# Altium PCB uku20710_proc.PcbDoc (part 1 of 2)
Units mm, origin at the board's own origin, x right, y up, seen from the top; angles counter-clockwise.
Board outline 354.7 x 156.7 mm, 4 copper layers (Top Layer, MidLayer1, MidLayer2, Bottom Layer); 206 components, 528 nets, 730 pads, 458 vias.
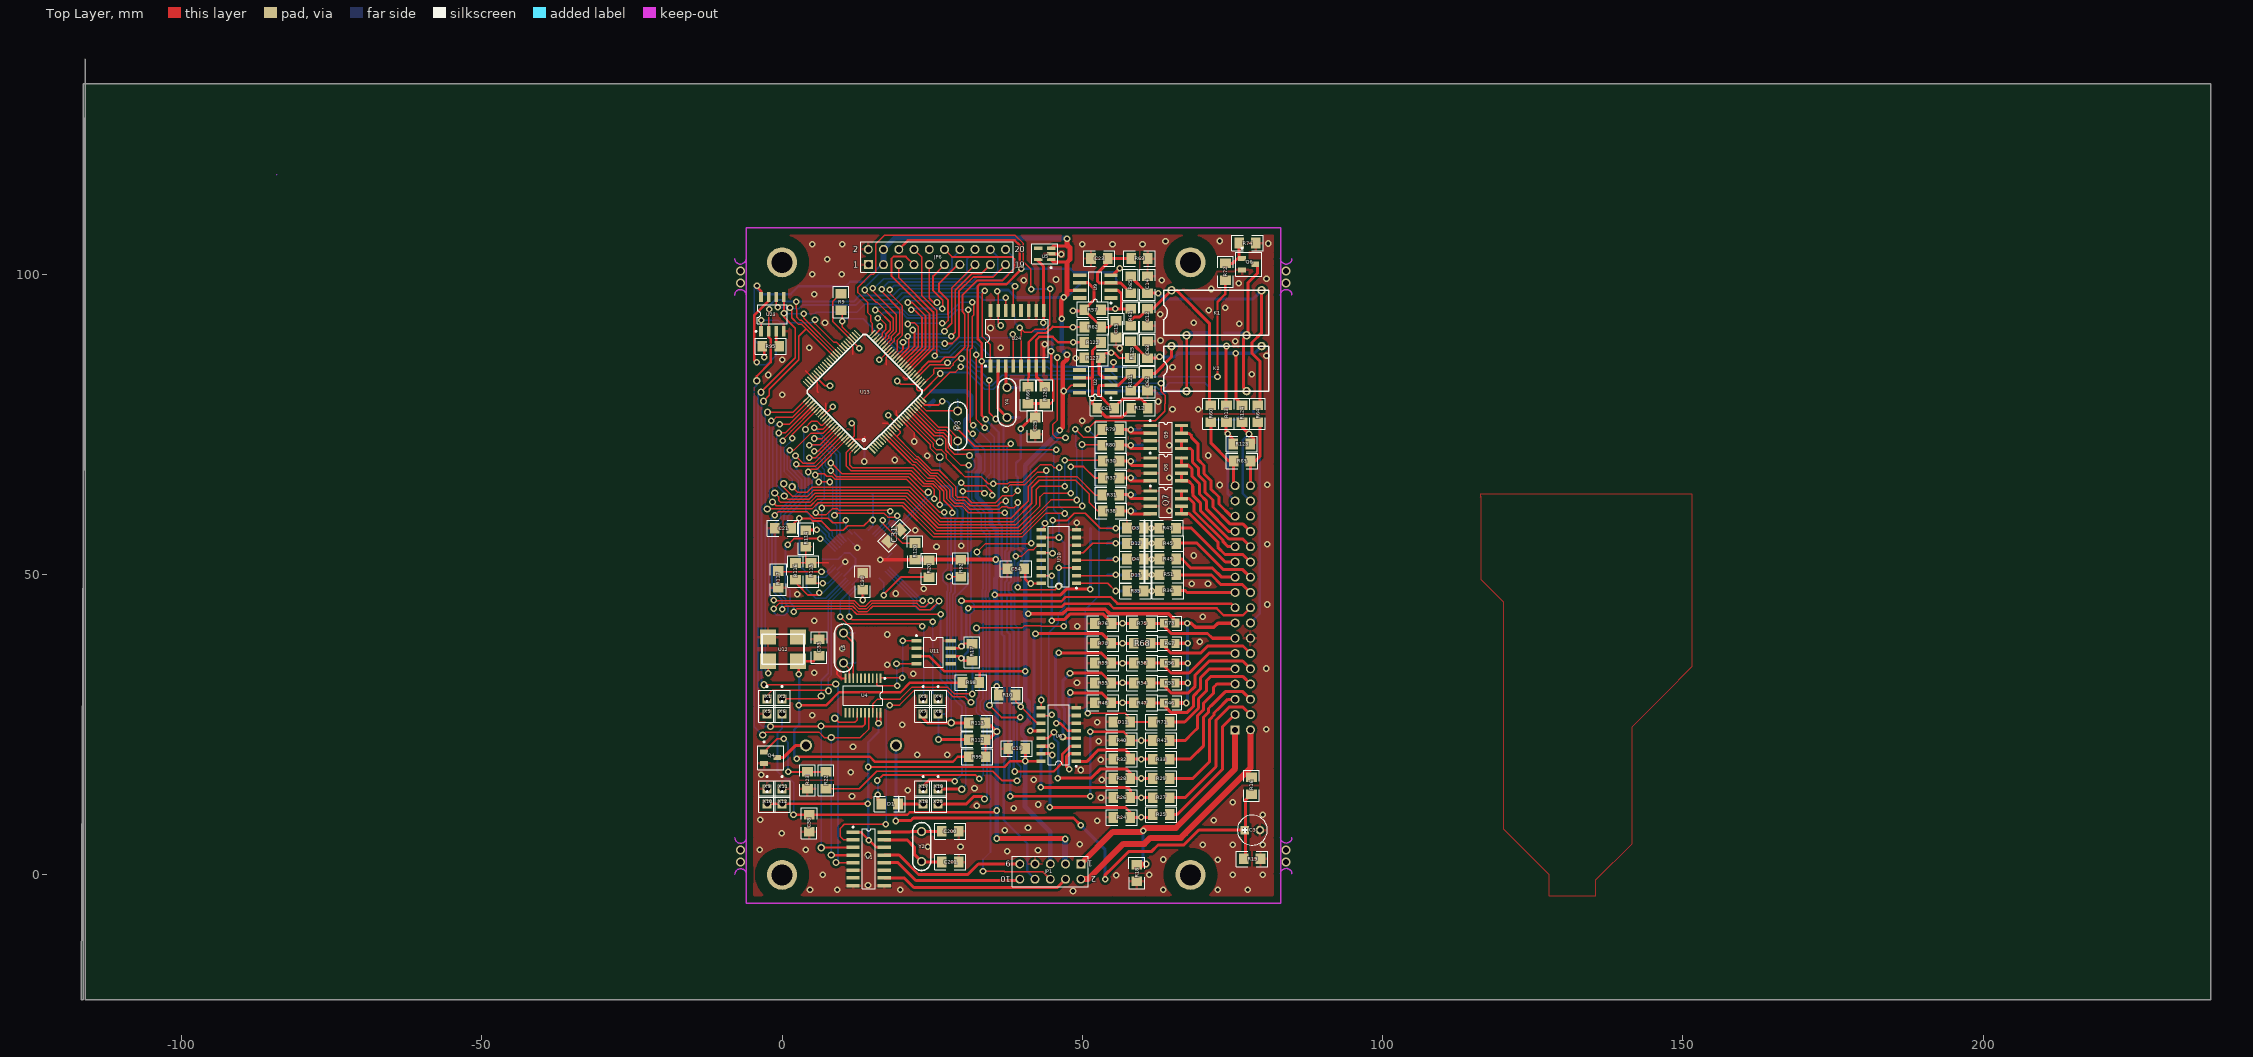
[diagram p0: Top Layer view]
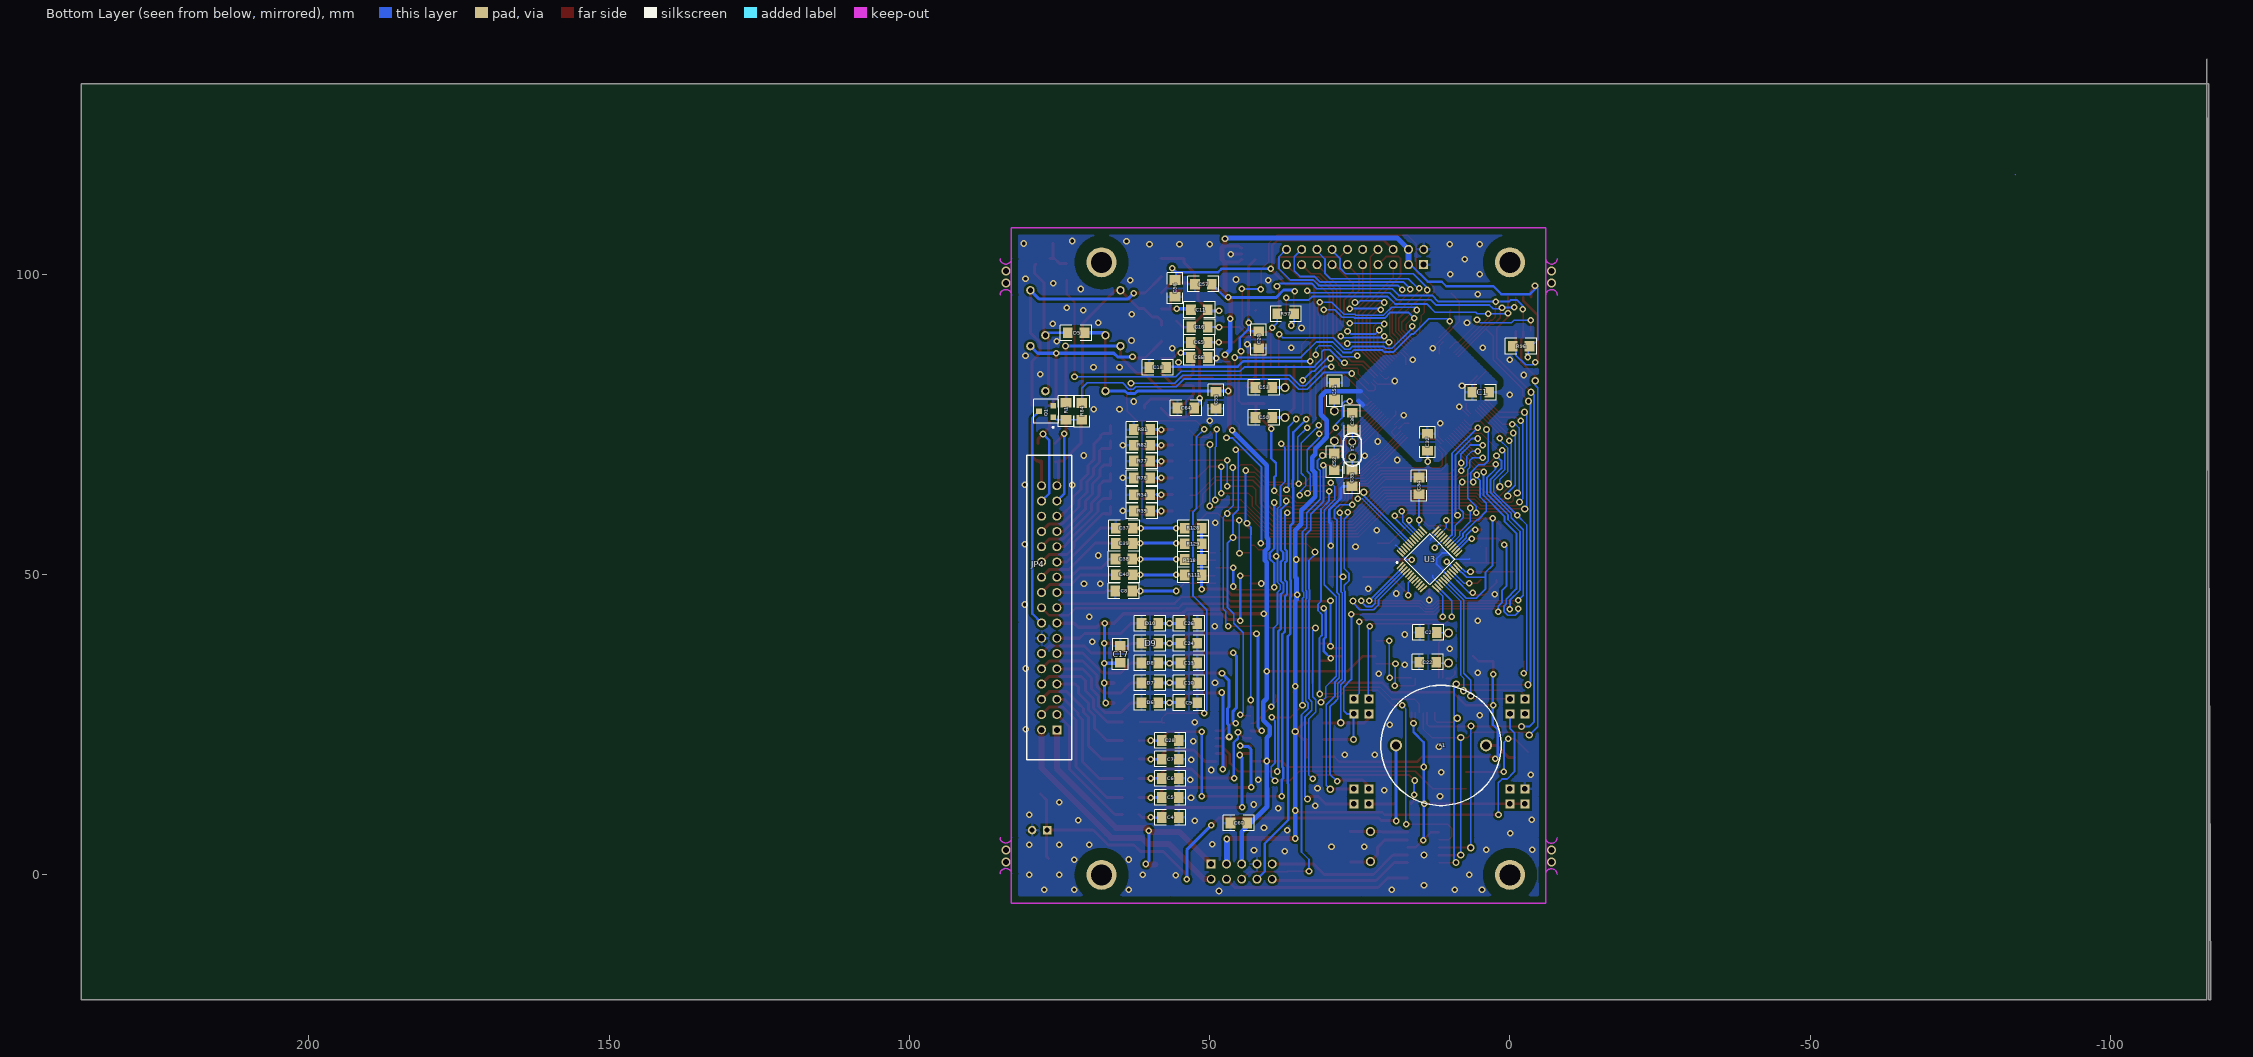
[diagram p1: Bottom Layer view, seen from below]

## Layer stack, top to bottom
Top Layer: signal copper 0.0356
Dielectric: core 0.32, FR-4, Dk 4.8
MidLayer1: signal copper 0.0356
Dielectric: prepreg 0.32, FR-4, Dk 4.8
MidLayer2: signal copper 0.0356
Dielectric: core 0.32, FR-4, Dk 4.8
Bottom Layer: signal copper 0.0356

## Board outline
-116.05,135.85 -116.05,-20.85 237.95,-20.85 237.95,131.7 -116.4,131.7 -116.4,-20.85 -116.75,-20.85

## Design rules (kind name [scope] priority, off if disabled: settings)
Clearance Holes [InPoly vs HasPad('Free-0') Or HasPad('Free-1') Or HasPad('Free-2') Or HasPad('Free-3')] p1: gap=2
Clearance Clearance_2 [All vs InPoly and InNet(GND_P)] p2: gap=1
Clearance Высоковольтное_2 [InNet(NetC511_2) or
InNet(NetD500_1) or
InNet(NetD503_1) or
InNet(NetD501_1) or
InNet(NetC500_2) or
InNet(NetC512_2) or
InNet(NetD500_2) or
InNet(NetD505_1) or
InNet(NetD506_1) or
InNet(NetD505_2) or
InNet(NetBT2_1) or
InNet(NetC516_2) or
InNet(NetC516_1) or
InNet(NetD20_2)  or
InNet(NetC510_1) or
InNet(NetC513_2) or
InNet(NetC517_1) vs InPoly] p3: gap=0.6
Clearance Высоковольтное [InNet(NetC505_2) or InNet(NetFU500_1)
or InNet(NetC511_1)or InNet(NetC502_2) vs InPoly] p4: gap=1
Clearance Clearance_1 [InComponent(U1)] p5: gap=0.19
Clearance Keep_Out [OnLayer('Keep-Out Layer')] p6: gap=1
Clearance Poly_Poly [InPoly vs InPoly] p7: gap=1
Clearance Poly [InPoly] p8: gap=0.4
Clearance "Для разъёма и индикатора" [InComponent(JP1) or InComponent(U2)] p9: gap=0.3
Clearance [All] p10: gap=0.18
ComponentClearance [All] p1: gap=0.254 collisioncheckmode=0
HoleSize [All] p1: absolutevalues=TRUE maxlimit=5 minlimit=0.025 maxpercent=80.000 minpercent=20.000
PolygonConnect [All] p1: connectstyle=Relief reliefconductorwidth=0.4 reliefentries=4 polygonreliefangle="90 Angle"
RoutingLayers [All] p1: top layer=Horizontal mid layer 1="Not Used" mid layer 2="Not Used" bottom layer=Vertical
RoutingVias [All] p1: holewidth=0.6 width=1.1 viastyle="Through Hole" minholewidth=0.6 minwidth=1.1 maxholewidth=0.7 maxwidth=1.2
SolderMaskExpansion [All] p1: expansion=0.102
TestPointUsage [All] p1: valid=0 allowmultiple=FALSE
Testpoint [All] p1: side=15 testpointundercomponent=TRUE minsize=1.016 maxsize=2.54 preferedsize=1.524 minholesize=0 maxholesize=1.016 preferedholesize=0.813 testpointgrid=0.025 style=1023 order=1234567890
Width [All] p1: maxlimit=2 minlimit=0.2 preferedwidth=0.254 toplayer_prefwidth=0.4 midlayer1_prefwidth=0.3 midlayer2_prefwidth=0.3 bottomlayer_prefwidth=0.4 minimp=50.000000 maximp=50.000000 favimp=50.000000
15 further rules are at their usual default settings.

## Classes and differential pairs
component class ETH: C21 C30 C31 C32 C33 C34 R20 R98 R99 R112 R113 R114 R115 R116 R117 R120 U3 U12 X1 X2 X3 X4 X5 X6 X7 X8
component class CPU: A1 C1 C2 C3 C22 C35 C36 C50 C51 C52 C53 C54 C55 C56 C57 C58 C60 C200 C201 D1 JP1 JP4 JP6 Q4 R9 R10 R16 R17 R18 R19 R22 R23 R92 R95 R96 R97 U1 U4 U5 U11 U13 U23 U24 X9 X10 X11 X12 X17 X18 X19 X20 Y1 Y2 Y3 Y4 Y5
component class IBPV11: +IAKB1 C4 C5 C6 C7 C8 C9 C10 C11 C12 C13 C14 C15 C16 C17 C18 C19 C20 C23 C24 C25 C26 C28 C37 C38 C39 C40 C61 C62 C63 C64 C65 C66 D3 D4 D5 D6 D7 D8 D9 D10 D11 D12 D13 K1 K2 NetC25_1 NetJ1_2 NetU14_4 NetU14_5 P0_3 P0_8_ P0_9_ P1_29 P1_31 PROG1 Q1 Q6 Q7 Q8 Q9 R1 R12 R13 R24 R25 R26 R27 R28 R29 R30 R31 R32 R33 R34 R35 R36 R37 R38 R39 R40 R41 R43 R45 R46 R47 R48 R49 R51 R53 R54 R55 R56 R57 R58 R59 R60 R61 R62 R63 R64 R65 R66 R67 R68 R69 R70 R71 R72 R73 R74 R75 R76 R77 R78 R79 R80 R81 R82 R84 R111 R118 R121 R122 R123 R124 R125 R126 R127 R128 R129 U2 U6 U9 U10 UU2 X39 X40 X41 X42 X43 X44 X45 X46 X47

## Components (designator, comment, footprint, x,y, rotation, side; value= is the part's Value field where it differs from the comment)
A1 "EFM260" Pjezo15 6.476,21.556 r0 bottom
C1 "1.0" _1206#1 4.85,80.35 r180 bottom
C2 "Cap Semi" _1206#1 13.577,40.361 r180 bottom
C3 "22.0 x 50" el3 77.05,7.45 r0 top
C4 "1.0" _1206#2 56.55,9.55 r180 bottom (schematic designator C11)
C5 "1.0" _1206#2 56.55,12.85 r180 bottom
C6 "1.0" _1206#2 56.55,16.05 r180 bottom (schematic designator C7)
C7 "1.0" _1206#2 56.55,19.25 r180 bottom (schematic designator C13)
C8 "1.0" _1206#2 64.29,47.263 r0 bottom (schematic designator C?)
C9 "1.0" _1206#2 53.45,28.65 r180 bottom (schematic designator C8)
C10 "1.0" _1206#2 53.45,31.95 r180 bottom (schematic designator C16)
C11 "0.1" _1206#2 51.7,94.1 r0 bottom
C12 "1.0" _1206#2 60.85,92.85 r90 top
C13 "1.0" _1206#2 53.45,35.25 r180 bottom
C14 "1.0" _1206#2 60.85,98.25 r270 top
C15 "1.0" _1206#2 55.6,90.874 r90 top
C16 "1.0" _1206#2 51.7,91.2 r180 bottom
C17 "1.0" _1206#2 64.89,36.71 r270 bottom
C18 "1.0" _1206#2 58.65,84.45 r180 bottom
C19 "1.0" _1206#2 39.06,21.005 r0 top
C20 "1.0" _1206#2 41.835,89.103 r90 bottom
C21 "0.1" C3216-1206 0.151,57.701 r180 top
C22 "Cap Semi" _1206#1 13.677,35.41 r180 bottom
C23 "0.1" _1206#2 52.837,102.627 r180 top
C24 "1.0" _1206#2 53.45,38.55 r180 bottom
C25 "1.0" _1206#2 42.15,74.75 r90 top
C26 "1.0" _1206#2 53.45,41.85 r180 bottom
C28 "1.0" _1206#2 56.55,22.35 r180 bottom
C30 "0.1" _1206#1 13.428,48.835 r270 top
C31 "0.1" _1206#1 18.654,56.5 r45 top
C32 "0.1" _1206#1 13.726,72.018 r270 bottom
C33 "0.1" _1206#1 6.152,37.86 r90 top
C34 "10,0x16" C3216-1206 15.128,64.767 r90 bottom
C35 "33" _1206#1 26.3,66.1 r90 bottom
C36 "33" _1206#1 26.25,75.55 r270 bottom
C37 "1.0" _1206#1 64.24,57.716 r0 bottom
C38 "1.0" _1206#1 64.29,52.564 r0 bottom
C39 "1.0" _1206#1 64.24,55.165 r0 bottom
C40 "1.0" _1206#1 64.24,49.964 r0 bottom
C50 "10" _1206#1 40.95,76.15 r180 bottom
C51 "10" _1206#2 29.2,80.55 r270 bottom
C52 "10" _1206#2 29.25,68.75 r90 bottom
C53 "10" _1206#1 40.95,81.15 r180 bottom
C54 "1.0" _1206#2 38.934,50.964 r0 top
C55 "1.0" _1206#2 48.95,79.05 r90 bottom
C56 "1.0" _1206#2 55.75,97.65 r90 bottom
C57 "1.0" _1206#2 51.05,98.35 r180 bottom
C58 "1.0" _1206#1 4.501,8.602 r90 top
C60 "1.0" _1206#2 45.135,8.603 r180 bottom
C61 "0.1" _1206#2 53.9,77.7 r0 top
C62 "1.0" _1206#2 60.85,82.05 r90 top
C63 "1.0" _1206#2 60.85,87.45 r270 top
C64 "1.0" _1206#2 53.95,77.75 r180 bottom
C65 "1.0" _1206#2 51.75,88.65 r180 bottom
C66 "0.1" _1206#2 51.75,86.15 r180 bottom
C200 "10" _1206#1 27.981,7.253 r180 top (schematic designator C2)
C201 "10" _1206#1 27.981,2.102 r180 top
D1 "LL4148" _1206d#1 17.905,11.803 r180 top
D3 "BZV55-C5V6" _1206d#1 58.839,57.716 r180 top
D4 "BZV55-C5V6" _1206d#1 58.839,52.564 r180 top
D5 "LL4148" _1206d#2 72.25,90.25 r0 bottom
D6 "BZV55-C5V6" _1206d#1 59.95,28.65 r0 bottom
D7 "BZV55-C5V6" _1206d#1 59.95,31.95 r0 bottom
D8 "BZV55-C5V6" _1206d#2 59.95,35.25 r0 bottom
D9 "BZV55-C5V6" _1206d#2 59.95,38.55 r0 bottom
D10 "BZV55-C5V6" _1206d#1 59.95,41.85 r0 bottom
D11 "BZV55-C3V9" _1206d#1 56.55,25.45 r180 top
D12 "BZV55-C5V6" _1206d#1 58.839,55.165 r180 top
D13 "BZV55-C5V6" _1206d#1 58.839,49.964 r180 top
JP1 "PBD-10" HDR2X5 49.736,1.8 r180 top
JP4 "IDC34" IDC34M 75.45,24.15 r90 bottom
JP6 "PBD-20" HDR2X10 14.35,101.6 r0 top
K1 "DH1A" kuan 64.85,89.85 r0 top
K2 "DH1A" kuan 64.85,80.55 r0 top
Q1 "IRLML2402" SO-G3/Z3.3 77.243,77.171 r90 bottom
Q4 "BC846" SO-G3 -1.9,19.505 r270 top
Q6 "BC846" SO-G3 77.7,101.677 r270 top
Q7 "IRF7103" SO-G8/Y2.2#1 63.9,62 r270 top
Q8 "IRF7103" SO-G8/Y2.2#2 63.9,67.5 r270 top
Q9 "IRF7103" SO-G8/Y2.2#2 63.9,72.9 r270 top
R1 "10K" _1206#1 73.893,77.171 r270 bottom
R9 "10K" _1206#1 9.825,95.374 r270 top
R10 "2K7" _1206#1 37.459,29.958 r180 top
R12 "20K" _1206#1 59.5,77.7 r180 top
R13 "10R" _1206#1 73.993,76.77 r270 top
R16 "10K" _1206#1 78.15,14.85 r90 top
R17 "K10" _1206#2 31.632,37.06 r90 top
R18 "1R" _1206#2 59.065,0.3 r270 top
R19 "2K7" _1206#1 78.25,2.65 r180 top
R20 "10K" _1206#1 24.478,50.985 r90 top
R22 "1K0" _1206#1 7.302,15.754 r90 top
R23 "10K" _1206#1 4.201,15.754 r90 top
R24 "1K0" _1206#1 56.55,9.55 r180 top
R25 "33K" _1206#1 63.15,10.053 r0 top
R26 "1K0" _1206#1 56.55,12.85 r180 top
R27 "33K" _1206#1 63.15,12.85 r0 top
R28 "1K0" _1206#1 56.55,16.05 r180 top
R29 "33K" _1206#1 63.15,16.05 r0 top
R30 "1K0" _1206#1 54.8,68.9 r0 top
R31 "1K0" _1206#1 54.75,63.25 r0 top
R32 "1K0" _1206#1 56.55,19.25 r180 top
R33 "33K" _1206#1 63.15,19.25 r0 top
R34 "10K" _1206#1 61.25,63.3 r180 bottom
R35 "1K0" _1206#1 58.839,47.263 r180 top (schematic designator R?)
R36 "33K" _1206#1 64.29,47.313 r0 top (schematic designator R?)
R37 "1K0" _1206#1 54.8,66.1 r0 top
R38 "1K0" _1206#3 54.8,60.6 r0 top
R39 "10K" _1206#1 61.25,60.6 r180 bottom
R40 "1K0" _1206#1 56.55,22.35 r180 top
R41 "10K" _1206#1 63.15,22.35 r0 top
R43 "6K2" _1206#1 64.19,57.716 r180 top
R45 "6K2" _1206#1 64.24,55.165 r180 top
R46 "1K0" _0805 64.55,28.65 r0 top
R47 "2K7" _1206#1 59.95,28.65 r180 top
R48 "10K" _1206#1 53.45,28.65 r0 top
R49 "6K2" _1206#1 64.24,52.564 r180 top
R51 "6K2" _1206#1 64.24,49.964 r180 top
R53 "1K0" _0805 64.55,31.95 r0 top
R54 "2K7" _1206#1 59.95,31.95 r180 top
R55 "10K" _1206#1 53.45,31.95 r0 top
R56 "1K0" _0805 64.55,35.25 r0 top
R57 "20K" _1206#1 51.7,94.1 r180 top
R58 "2K7" _1206#1 59.95,35.25 r180 top
R59 "10K" _1206#1 53.45,35.25 r0 top
R60 "10R" _1206#1 71.392,76.77 r270 top
R61 "2K0" _1206#1 58.05,92.85 r90 top
R62 "20K" _1206#1 51.75,91.2 r180 top
R63 "10R" _1206#3 76.593,68.918 r180 top
R64 "10R" _1206#3 79.194,76.77 r270 top
R65 "2K0" _1206#3 58.05,98.25 r270 top
R66 "20K" _1206#1 40.95,79.85 r270 top
R67 "1K0" _0805 64.55,38.511 r0 top
R68 "2K7" _1206#1 59.95,38.55 r180 top
R69 "20K" _1206#1 59.5,102.6 r180 top
R70 "10K" _1206#1 53.45,38.55 r0 top
R71 "20K" _1206#1 63.15,25.45 r0 top
R72 "1K0" _1206#3 73.843,100.426 r90 top
R73 "1K0" _0805 64.55,41.912 r0 top
R74 "10K" _1206#1 77.494,105.178 r180 top
R75 "2K7" _1206#1 59.95,41.85 r180 top
R76 "10K" _1206#3 53.45,41.85 r0 top
R77 "10K" _1206#1 61.25,68.9 r180 bottom
R78 "10K" _1206#1 61.25,66.1 r180 bottom
R79 "1K0" _1206#1 54.75,74.15 r0 top
R80 "1K0" _1206#1 54.75,71.55 r0 top
R81 "10K" _1206#1 61.25,74.15 r180 bottom
R82 "10K" _1206#1 61.25,71.55 r180 bottom
R84 "1K0" _1206#2 71.292,77.171 r270 bottom
R92 "1K0" _1206#1 29.731,51.05 r90 top
R95 "2K7" _1206#1 -1.9,88 r180 top
R96 "2K7" _1206#1 -1.85,88 r0 bottom
R97 "1K0" _1206#1 37.333,93.425 r180 bottom
R98 "1R" _1206#1 31.458,32.008 r0 top
R99 "1R0" _1206#1 32.508,19.655 r0 top
R111 "33K" _1206#1 52.75,49.914 r0 bottom (schematic designator R?)
R112 "2K2" _1206#1 32.482,22.507 r0 top
R113 "2K2" _1206#1 32.482,25.307 r0 top
R114 "2K2" _1206#1 3.952,55.985 r270 top
R115 "2K2" _1206#1 4.828,50.535 r90 top
R116 "2K2" _1206#1 2.228,50.535 r90 top
R117 "4K87" _1206#1 -0.65,49.198 r90 top
R118 "33K" _1206#1 52.75,52.514 r0 bottom (schematic designator R?)
R120 "2K2" _1206#1 22.128,53.835 r270 top (schematic designator R100)
R121 "2K0" _1206#1 58.05,82.05 r90 top (schematic designator R101)
R122 "20K" _1206#1 51.7,88.65 r180 top (schematic designator R102)
R123 "10R" _1206#1 76.543,71.719 r180 top (schematic designator R103)
R124 "10R" _1206#1 76.593,76.77 r270 top (schematic designator R104)
R125 "2K0" _1206#1 58.05,87.45 r270 top (schematic designator R105)
R126 "20K" _1206#1 43.75,79.85 r270 top (schematic designator R106)
R127 "20K" _1206#1 51.7,86.1 r0 top (schematic designator R107)
R128 "33K" _1206#1 52.75,57.7 r0 bottom (schematic designator R?)
R129 "33K" _1206#1 52.75,55.115 r0 bottom (schematic designator R?)
U1 "SC16IS740" SO-G16 14.428,2.652 r270 top
U2 "OP07CS" SO-G8#1 52.15,82.15 r90 top
U3 "DP8348C" F-QFP7X7-G48/N 13.378,52.535 r135 bottom
U4 "MCP2515" TSSO6X6-G20/D6.6 13.477,29.859 r180 top
U5 "TPS76333" SO-G5/P.95 43.734,103.4 r90 top
U6 "MC14051BD" SO-G16/C5.85#1 46.05,23.35 r90 top
U9 "OP07CS" SO-G8#2 52.15,97.95 r90 top
U10 "MC14051BD" SO-G16/C5.85#2 46.1,53 r90 top
U11 "TJA1050" SO-G8/D5 25.23,37.06 r270 top
U12 "KXO-97-50MGz" KXO-97 0.15,37.559 r180 top
U13 "LPC1766FBD100" LPC2368 13.75,80.45 r45 top
U23 "25LC640" SO-G8/D5 -1.6,93.35 r0 top
U24 "AD7705" SO-G16/D10.4 39.15,89.35 r0 top
X1 "" PIN1#1 -2.503,29.3 r0 top
X2 "" PIN1#1 -0.003,29.3 r0 top
X3 "" PIN1#1 23.497,29.3 r0 top
X4 "" PIN1#2 25.997,29.3 r0 top
X5 "" PIN1#2 -2.503,26.8 r0 top
X6 "" PIN1#2 -0.003,26.8 r0 top
X7 "" PIN1#2 23.497,26.8 r0 top
X8 "" PIN1#2 25.997,26.8 r0 top
X9 "" PIN1#3 -2.503,14.3 r0 top
X10 "" PIN1#3 -2.503,11.8 r0 top
X11 "" PIN1#3 -0.003,14.3 r0 top
X12 "" PIN1#3 -0.003,11.8 r0 top
X17 "" PIN1#3 23.497,14.3 r0 top
X18 "" PIN1#3 23.497,11.8 r0 top
X19 "" PIN1#3 25.997,14.3 r0 top
X20 "" PIN1#3 25.997,11.8 r0 top
Y1 "32768" QWARZ2 26.255,72.049 r270 bottom
Y2 "10MGz" QWARZ1 23.23,2.202 r90 top
Y3 "10MGz" QWARZ1 29.25,77.25 r270 top
Y4 "4,9152MGz" QWARZ1 37.45,76.15 r90 top
Y5 "8MGz" QWARZ1 10.227,35.26 r90 top

## Footprints (in the part's own frame and the unit in brackets; to place one, negate y for a bottom-side part, rotate by r counter-clockwise, add the part's x,y. Pads: shape width x height; smd on the part's side, far side on the other; paste and mask are expansions set on the pad)
_0805 [mm]
  rect 1.3x1.5 smd: 1(-0.942,-0.005) 2(0.958,-0.005)
  silkscreen extent -1.99,-1.16 2.01,1.14
_1206#1 [mm]
  rect 1.6x1.8 smd: 1(-1.412,-0.007) 2(1.388,-0.007)
  silkscreen extent -2.61,-1.31 2.59,1.29
_1206#2 [mm]
  rect 1.6x1.8 smd: 1(-1.397,0.003) 2(1.403,0.003)
  silkscreen extent -2.6,-1.3 2.6,1.3
_1206#3 [mm]
  rect 1.6x1.8 smd: 1(-1.4,0) 2(1.4,0)
  silkscreen extent -2.6,-1.3 2.6,1.3
_1206d#1 [mm]
  rect 1.6x1.8 smd: 1(1.395,-0.009) 2(-1.405,-0.009)
  silkscreen extent -2.6,-1.31 2.6,1.29
_1206d#2 [mm]
  rect 1.6x1.8 smd: 1(1.4,0) 2(-1.4,0)
  silkscreen extent -2.6,-1.3 2.6,1.3
C3216-1206 [mm]
  rect 1.6x1.8 smd: 1(-1.4,0) 2(1.4,0)
  silkscreen extent -2.6,-1.3 2.6,1.3
el3 [mm]
  rect 1.4x1.4 hole 0.85: 1(0.011,-0.008)
  round 1.4 hole 0.85: 2(2.511,-0.008)
  silkscreen extent -1.23,-2.51 3.76,2.49
F-QFP7X7-G48/N [mm]
  rect 1.55x0.3 smd: 1(-4.192,2.749) 2(-4.192,2.249) 3(-4.192,1.749) 4(-4.192,1.249) 5(-4.192,0.749) 6(-4.192,0.249) 7(-4.192,-0.251) 8(-4.192,-0.751) 9(-4.192,-1.251) 10(-4.192,-1.751) 11(-4.192,-2.251) 12(-4.192,-2.751) 25(4.158,-2.751) 26(4.158,-2.251) 27(4.158,-1.751) 28(4.158,-1.251) 29(4.158,-0.751) 30(4.158,-0.251) 31(4.158,0.249) 32(4.158,0.749) 33(4.158,1.249) 34(4.158,1.749) 35(4.158,2.249) 36(4.158,2.749)
  rect 0.3x1.55 smd: 13(-2.767,-4.176) 14(-2.267,-4.176) 15(-1.767,-4.176) 16(-1.267,-4.176) 17(-0.767,-4.176) 18(-0.267,-4.176) 19(0.233,-4.176) 20(0.733,-4.176) 21(1.233,-4.176) 22(1.733,-4.176) 23(2.233,-4.176) 24(2.733,-4.176) 37(2.733,4.174) 38(2.233,4.174) 39(1.733,4.174) 40(1.233,4.174) 41(0.733,4.174) 42(0.233,4.174) 43(-0.267,4.174) 44(-0.767,4.174) 45(-1.267,4.174) 46(-1.767,4.174) 47(-2.267,4.174) 48(-2.767,4.174)
  silkscreen extent -4.32,-3 2.98,3.57
HDR2X5 [mm]
  rect 1.5x1.5 hole 1: 1(0,0)
  round 1.5 hole 1: 2(0,2.54) 3(2.54,0) 4(2.54,2.54) 5(5.08,0) 6(5.08,2.54) 7(7.62,0) 8(7.62,2.54) 9(10.16,0) 10(10.16,2.54)
  silkscreen extent -1.27,-1.27 11.43,3.81
HDR2X10 [mm]
  rect 1.5x1.5 hole 1: 1(0,0)
  round 1.5 hole 1: 2(0,2.54) 3(2.54,0) 4(2.54,2.54) 5(5.08,0) 6(5.08,2.54) 7(7.62,0) 8(7.62,2.54) 9(10.16,0) 10(10.16,2.54) 11(12.7,0) 12(12.7,2.54) 13(15.24,0) 14(15.24,2.54) 15(17.78,0) 16(17.78,2.54) 17(20.32,0) 18(20.32,2.54) 19(22.86,0) 20(22.86,2.54)
  silkscreen extent -1.27,-1.27 24.13,3.81
IDC34M [mm]
  rect 1.5x1.5 hole 1: 1(0,0)
  round 1.5 hole 1: 2(0,2.54) 3(2.54,0) 4(2.54,2.54) 5(5.08,0) 6(5.08,2.54) 7(7.62,0) 8(7.62,2.54) 9(10.16,0) 10(10.16,2.54) 11(12.7,0) 12(12.7,2.54) 13(15.24,0) 14(15.24,2.54) 15(17.78,0) 16(17.78,2.54) 17(20.32,0) 18(20.32,2.54) 19(22.86,0) 20(22.86,2.54) 21(25.4,0) 22(25.4,2.54) 23(27.94,0) 24(27.94,2.54) 25(30.48,0) 26(30.48,2.54) 27(33.02,0) 28(33.02,2.54) 29(35.56,0) 30(35.56,2.54) 31(38.1,0) 32(38.1,2.54) 33(40.64,0) 34(40.64,2.54)
  silkscreen extent -5,-2.5 45.7,5
kuan [mm]
  round 1.4 hole 0.85: 1(15.006,7.49) 3(0.006,7.49) 4(2.506,-0.01) 5(12.506,-0.01)
  silkscreen extent -1.34,-0.01 16.21,7.49
KXO-97 [mm]
  rect 2.7x2.5 smd: 1(-2.5,-2) 2(2.5,-2) 3(2.5,2) 4(-2.5,2)
  silkscreen extent -3.5,-2.5 3.5,2.5
LPC2368 [mm]
  rect 0.25x1.5 smd: 1(-6,-7.775)
  oval 0.25x1.5 smd: 2(-5.5,-7.75) 3(-5,-7.75) 4(-4.5,-7.75) 5(-4,-7.75) 6(-3.5,-7.75) 7(-3,-7.75) 8(-2.5,-7.75) 9(-2,-7.75) 10(-1.5,-7.75) 11(-1,-7.75) 12(-0.5,-7.75) 13(0,-7.75) 14(0.5,-7.75) 15(1,-7.75) 16(1.5,-7.75) 17(2,-7.75) 18(2.5,-7.75) 19(3,-7.75) 20(3.5,-7.75) 21(4,-7.75) 22(4.5,-7.75) 23(5,-7.75) 24(5.5,-7.75) 25(6,-7.75) 51(6,7.75) 52(5.5,7.75) 53(5,7.75) 54(4.5,7.75) 55(4,7.75) 56(3.5,7.75) 57(3,7.75) 58(2.5,7.75) 59(2,7.75) 60(1.5,7.75) 61(1,7.75) 62(0.5,7.75) 63(0,7.75) 64(-0.5,7.75) 65(-1,7.75) 66(-1.5,7.75) 67(-2,7.75) 68(-2.5,7.75) 69(-3,7.75) 70(-3.5,7.75) 71(-4,7.75) 72(-4.5,7.75) 73(-5,7.75) 74(-5.5,7.75) 75(-6,7.75)
  oval 1.5x0.25 smd: 26(7.75,-6) 27(7.75,-5.5) 28(7.75,-5) 29(7.75,-4.5) 30(7.75,-4) 31(7.75,-3.5) 32(7.75,-3) 33(7.75,-2.5) 34(7.75,-2) 35(7.75,-1.5) 36(7.75,-1) 37(7.75,-0.5) 38(7.75,0) 39(7.75,0.5) 40(7.75,1) 41(7.75,1.5) 42(7.75,2) 43(7.75,2.5) 44(7.75,3) 45(7.75,3.5) 46(7.75,4) 47(7.75,4.5) 48(7.75,5) 49(7.75,5.5) 50(7.75,6) 76(-7.75,6) 77(-7.75,5.5) 78(-7.75,5) 79(-7.775,4.475) 80(-7.75,4) 81(-7.75,3.5) 82(-7.75,3) 83(-7.75,2.5) 84(-7.75,2) 85(-7.75,1.5) 86(-7.75,1) 87(-7.75,0.5) 88(-7.75,0) 89(-7.75,-0.5) 90(-7.75,-1) 91(-7.75,-1.5) 92(-7.75,-2) 93(-7.75,-2.5) 94(-7.775,-3.025) 95(-7.75,-3.5) 96(-7.75,-4) 97(-7.75,-4.5) 98(-7.75,-5) 99(-7.75,-5.5) 100(-7.75,-6)
  silkscreen extent -6.93,-6.93 6.93,6.93
PIN1#1 [mm]
  rect 1.5x1.5 hole 1: 1(0,0)
  silkscreen extent -1.4,-1.4 1.4,2.17
PIN1#2 [mm]
  rect 1.5x1.5 hole 0.95: 1(0,0)
  silkscreen extent -1.4,-1.4 1.4,2.17
PIN1#3 [mm]
  rect 1.5x1.5 hole 0.9: 1(0,0)
  silkscreen extent -1.4,-1.4 1.4,2.17
Pjezo15 [mm]
  round 2 hole 1.3: 1(-2.503,0.012) 2(12.497,0.012)
  silkscreen extent -5.02,-10 15.01,10.02
QWARZ1 [mm]
  round 1.5 hole 1: 1(0.008,0) 2(5.008,0)
  silkscreen extent -1.49,-1.5 6.51,1.5
QWARZ2 [mm]
  round 1.3 hole 0.85: 1(0.001,0.005) 2(2.501,0.005)
  silkscreen extent -1.5,-1.5 4,1.5
SO-G3 [mm]
  rect 0.85x1.3 smd: 1(-0.948,-1.102) 2(0.952,-1.102) 3(0.002,1.098)
  silkscreen extent -2.77,-2.15 2,2.15
SO-G3/Z3.3 [mm]
  rect 0.9x0.95 smd: 1(-0.954,-1.179) 2(0.946,-1.179) 3(-0.004,1.171)
  silkscreen extent -2.78,-2.05 2,2.05
SO-G5/P.95 [mm]
  rect 0.55x1.45 smd: 1(-0.95,-1.075) 2(0,-1.075) 3(0.95,-1.075) 4(0.95,1.075) 5(-0.95,1.075)
  silkscreen extent -2.42,-2.2 1.65,2.2
SO-G8#1 [mm]
  rect 0.6x2.2 smd: 1(-1.905,-2.6) 2(-0.635,-2.6) 3(0.635,-2.6) 4(1.905,-2.6) 5(1.905,2.6) 6(0.635,2.6) 7(-0.635,2.6) 8(-1.905,2.6)
  silkscreen extent -2.88,-2.72 2.5,1.1
SO-G8#2 [mm]
  rect 0.6x2.2 smd: 1(-1.902,-2.611) 2(-0.632,-2.611) 3(0.638,-2.611) 4(1.908,-2.611) 5(1.908,2.589) 6(0.638,2.589) 7(-0.632,2.589) 8(-1.902,2.589)
  silkscreen extent -2.88,-2.74 2.5,1.09
SO-G8/D5 [mm]
  rect 0.6x1.7 smd: 1(-1.905,-2.85) 2(-0.635,-2.85) 3(0.635,-2.85) 4(1.905,-2.85) 5(1.905,2.85) 6(0.635,2.85) 7(-0.635,2.85) 8(-1.905,2.85)
  silkscreen extent -2.88,-2.97 2.5,1.6
SO-G8/Y2.2#1 [mm]
  rect 0.55x2.2 smd: 1(-1.91,-2.588) 2(-0.64,-2.588) 3(0.63,-2.588) 4(1.9,-2.588) 5(1.9,2.612) 6(0.63,2.612) 7(-0.64,2.612) 8(-1.91,2.612)
  silkscreen extent -2.86,-2.71 2.49,1.11
SO-G8/Y2.2#2 [mm]
  rect 0.55x2.2 smd: 1(-1.905,-2.6) 2(-0.635,-2.6) 3(0.635,-2.6) 4(1.905,-2.6) 5(1.905,2.6) 6(0.635,2.6) 7(-0.635,2.6) 8(-1.905,2.6)
  silkscreen extent -2.85,-2.72 2.5,1.1
SO-G16 [mm]
  rect 0.6x2.2 smd: 1(-4.445,-2.6) 2(-3.175,-2.6) 3(-1.905,-2.6) 4(-0.635,-2.6) 5(0.635,-2.6) 6(1.905,-2.6) 7(3.175,-2.6) 8(4.445,-2.6) 9(4.445,2.6) 10(3.175,2.6) 11(1.905,2.6) 12(0.635,2.6) 13(-0.635,2.6) 14(-1.905,2.6) 15(-3.175,2.6) 16(-4.445,2.6)
  silkscreen extent -5.42,-2.72 5,1.1
SO-G16/C5.85#1 [mm]
  rect 0.6x1.55 smd: 1(-4.452,-2.93) 2(-3.182,-2.93) 3(-1.912,-2.93) 4(-0.642,-2.93) 5(0.628,-2.93) 6(1.898,-2.93) 7(3.168,-2.93) 8(4.438,-2.93) 9(4.438,2.92) 10(3.168,2.92) 11(1.898,2.92) 12(0.628,2.92) 13(-0.642,2.92) 14(-1.912,2.92) 15(-3.182,2.92) 16(-4.452,2.92)
  silkscreen extent -5.4,-3.05 4.99,1.75
SO-G16/C5.85#2 [mm]
  rect 0.6x1.55 smd: 1(-4.445,-2.925) 2(-3.175,-2.925) 3(-1.905,-2.925) 4(-0.635,-2.925) 5(0.635,-2.925) 6(1.905,-2.925) 7(3.175,-2.925) 8(4.445,-2.925) 9(4.445,2.925) 10(3.175,2.925) 11(1.905,2.925) 12(0.635,2.925) 13(-0.635,2.925) 14(-1.905,2.925) 15(-3.175,2.925) 16(-4.445,2.925)
  silkscreen extent -5.39,-3.05 5,1.75
SO-G16/D10.4 [mm]
  rect 0.6x2.15 smd: 1(-4.445,-4.625) 2(-3.175,-4.625) 3(-1.905,-4.625) 4(-0.635,-4.625) 5(0.635,-4.625) 6(1.905,-4.625) 7(3.175,-4.625) 8(4.445,-4.625) 9(4.445,4.625) 10(3.175,4.625) 11(1.905,4.625) 12(0.635,4.625) 13(-0.635,4.625) 14(-1.905,4.625) 15(-3.175,4.625) 16(-4.445,4.625)
  silkscreen extent -5.42,-4.75 5.2,3.15
TSSO6X6-G20/D6.6 [mm]
  rect 0.3x1.6 smd: 1(-2.925,-2.85) 2(-2.275,-2.85) 3(-1.625,-2.85) 4(-0.975,-2.85) 5(-0.325,-2.85) 6(0.325,-2.85) 7(0.975,-2.85) 8(1.625,-2.85) 9(2.275,-2.85) 10(2.925,-2.85) 11(2.925,2.85) 12(2.275,2.85) 13(1.625,2.85) 14(0.975,2.85) 15(0.325,2.85) 16(-0.325,2.85) 17(-0.975,2.85) 18(-1.625,2.85) 19(-2.275,2.85) 20(-2.925,2.85)
  silkscreen extent -3.75,-2.97 3.3,1.65

## Part data
A1: library part PJEZ0
C1 C28 C37 C38 C39 C40 C58 C200 C201: library part "Cap Semi", "Capacitor"
C2 C22: "Capacitor (Semiconductor SIM Model)"
C3 C34: library part "Cap Pol1", "Polarized Capacitor (Radial)"
C4 C5 C6 C7 C8 C9 C10 C11 C12 C13 C14 C15 C16 C17 C18 C19 C20 C21 C23 C24 C25 C26 C30 C31 C32 C33 C35 C36 C50 C51 C52 C53 C54 C55 C56 C57 C60 C61 C62 C63 C64 C65 C66: library part "Cap Semi", "Capacitor (Semiconductor SIM Model)"
D1: library part Diode, "Diode"
D3 D4 D5 D6 D7 D8 D9 D10 D11 D12 D13: library part "D Zener", "Zener Diode"
JP1: library part "Header 5X2", "Header, 5-Pin, Dual row"
JP4: library part MHDR2X13, "Header, 13-Pin, Dual row"
JP6: library part "Header 10X2", "Header, 10-Pin, Dual row"
K1 K2: library part BS115, "Single-Pole Dual-Throw Relay"
Q1: "HEXFET Power MOSFET"
Q4 Q6: library part GT122
Q7 Q8 Q9: library part IRF7301, "HEXFET Power MOSFET"
R1 R9 R10 R12 R13 R16 R17 R18 R19 R20 R22 R23 R24 R25 R26 R27 R28 R29 R30 R31 R32 R33 R34 R35 R36 R37 R38 R39 R40 R41 R43 R45 R46 R47 R48 R49 R51 R53 R54 R55 R56 R57 R58 R59 R60 R61 R62 R63 R64 R65 R66 R67 R68 R69 R70 R71 R72 R73 R74 R75 R76 R77 R78 R79 R80 R81 R82 R84 R92 R95 R96 R97 R98 R99 R111 R112 R113 R114 R115 R116 R117 R118 R120 R121 R122 R123 R124 R125 R126 R127 R128 R129: library part Res2, "Resistor"
U2 U9: "Ultra-Low Offset Voltage Operational Amplifier"
U5: library part LP2980AIM5-3.3, "Micropower SOT, 50 mA Ultra Low-Dropout Regulator"
U6 U10: "8-Channel Analog Multiplexer/Demultiplexer"
U12: library part KXO-97
U13: library part LPC2368FBD100
X1 X2 X3 X4 X5 X6 X7 X8 X9 X10 X11 X12 X17 X18 X19 X20: library part Socket, "Socket"
Y1 Y2 Y3 Y4 Y5: library part XTAL, "Crystal Oscillator"

## Free pads (board coordinates)
  round 5 hole 3.5: 0(0,102) 0(0,0) 0(68,0) 0(68,102)

## Via types
v1: diameter 1.1, hole 0.6, Top Layer to Bottom Layer, 420 vias
v2: diameter 1.2, hole 0.7, Top Layer to Bottom Layer, 29 vias
v3: diameter 1.5, hole 1, Top Layer to Bottom Layer, 8 vias
v4: diameter 1.2, hole 0.6, Top Layer to Bottom Layer, 1 vias

## Nets (pads, with @x,y where several pads share a name; then routed paths per layer and width w, separated by ;. In a path a pad name is that pad's centre, name@x,y a point inside that pad or via, vN(x,y) a via of type N, cw(c..) or ccw(c..) an arc to the next point about the centre after c; other vN are vias at no path point)
485-DD: JP1.4 U1.10 | length 31.4
  Top Layer w0.5: U1.10@17.028,-0.523 20.353,-0.523 21.93,-2.099 45.837,-2.099 JP1.4@47.196,-0.74
485-RX: JP1.9 U1.13 | length 27.3
  Top Layer w0.5: U1.13@17.028,3.287 19.494,3.287 22.73,0.051 30.932,0.051 ; 30.682,0.051 30.932,0.051 ; 32.632,1.752 30.932,0.051 ; JP1.9@39.576,1.8 32.681,1.8 30.932,0.051
485-TX: JP1.10 U1.12 | length 23.9
  Top Layer w0.5: U1.12@17.028,2.017 19.314,2.017 22.28,-0.949 39.367,-0.949 JP1.10@39.576,-0.74
+3V3: C1.1 C30.1 C31.1 C32.1 C58.2 JP1.3 R9.1 R10.2 R20.2 R92.2 R99.2 R111.1 R112.2 R113.2 R114.2 R115.2 R116.2 R118.1 R120.2 R128.1 R129.1 U3.22 U3.32 U3.48 U13.13 U13.28 U13.42 U13.54 U13.71 U13.84 U13.96 X6.1 | length 255.2
  Top Layer w0.25: R116.2@2.234,51.923 3.925,51.923 R115.2@4.834,51.923 7.665,51.923 7.677,51.935 ; 4.878,54.604 4.878,54.635 ; U13.71@5.442,83.102 6.943,81.6 6.95,81.6 7.1,81.45 v1(7.976,81.45) ; U13.84@6.856,76.384 8.422,77.95 v1(8.45,77.95) ; R9.1@9.875,96.874 9.825,96.874 9.778,96.827 8.425,95.474 8.425,92.139 U13.54@11.452,89.112 12.85,87.714 v1(12.85,87.7) ; U13.96@11.098,72.141 11.977,73.02 11.977,74.87 v1(11.627,75.22) ; v1(16.2,85.75) 16.222,85.75 U13.42@17.816,87.344 ; v1(17.7,76.5) U13.13@19.23,74.97 ; v1(19.2,82.222) 19.75,81.672 22.043,81.672 U13.28@22.766,82.395
  Top Layer w0.3: 3.902,51.9 3.925,51.923 3.952,51.95 R114.2@3.952,54.55
  Top Layer w0.4: v1(1.9,10.003) 20.855,10.003 21.255,10.403 35.459,10.403 v1(35.759,10.703) ; R99.2@33.859,19.555 33.87,19.566 R112.2@33.87,22.5 ; R10.2@35.75,29.69 v1@35.75,31.308 ; R10.2@35.75,30.642 R10.2@35.983,30.409
  Top Layer w0.5: R112.2@33.87,22.5 34.376,22.5 v2(35.733,23.857) 34.333,25.257 R113.2@33.883,25.257 ; v1(35.383,46.613) 46.386,46.613 47.336,47.563 v1(51.338,47.563)
  Top Layer w0.6: v1@16.428,52.485 16.378,52.485 16.328,52.485 v1(16.378,52.435) 22.121,52.435 R20.2@24.484,52.435 ; R120.2@21.707,52.5 29.738,52.5 31.981,52.5 v1(35.55,52.5) v1@35.65,52.5
  Top Layer w0.8: v1(35.75,6.05) 47.038,6.05 v1(47.136,5.953)
  Bottom Layer w0.25: U3.22@9.2,50.808 v1(10.528,52.135) ; U3.32@10.967,56.005 12.528,54.445 v1(12.528,54.435) ; v1(16.378,52.435) 17.191,52.435 U3.48@18.286,53.53
  Bottom Layer w0.3: X6.1@-0.003,26.8 -0.003,24.404 -0.75,23.656 -0.75,17.154 0.45,15.954 1.3,15.954 1.95,15.304 1.95,10.053 v1(1.9,10.003)
  Bottom Layer w0.5: v1@51.337,47.512 51.337,47.414 51.338,54.157 ; R129.1@51.338,54.907 R128.1@51.338,57.707
  Bottom Layer w0.7: 24.847,80.52 30.63,80.52
  Bottom Layer w0.8: 24.529,78.25 25.229,78.95 ; 30.63,80.52 31.5,79.651 31.5,76.65 30.5,75.65 30.5,72.9 31.531,71.869 ; 31.531,71.868 32.431,70.968 32.431,69.995 32.908,69.518 32.908,67.417 32.458,66.967 32.458,64.866 ; 32.431,64.866 32.431,62.968 34.083,61.317 ; 34.081,61.315 34.731,60.665 34.731,58.415 35.682,57.464 ; 35.59,57.56 35.684,57.466 35.75,57.4 ; 35.733,57.39 35.733,49.564 35.533,49.363 35.533,45.863 35.75,45.646 35.75,15.85 ; v1(35.75,6.05) 35.75,15.85
  Bottom Layer w1: v1(47.136,5.953) 47.136,1.802 JP1.3@47.186,1.752
  other v1: 35.759,31.408
+5V: C17.2 C19.2 C54.2 C55.2 C57.2 C60.2 D5.2 JP1.5 JP4.15 JP6.3 JP6.4 K1.4 K2.4 R46.2 R53.2 R56.2 R67.2 R73.2 R95.2 R96.1 R97.2 R98.2 U1.1 U1.14 U2.7 U4.19 U4.20 U5.1 U5.3 U6.16 U9.7 U10.16 U11.3 U23.8 U24.15 X10.1 X12.1 | length 417.4
  Top Layer w0.25: v1(35.8,97.176) 35.975,97 U24.15@35.975,93.975 35.975,91.932 v1(36.433,91.474) ; U24.15@35.95,93.975 U24.15@35.95,94.5
  Top Layer w0.3: U4.19@15.752,27.009 15.752,25.508 v1(16.054,25.206) 16.404,25.556 16.404,27.007 U4.20@16.402,27.009 ; v1@47.2,80.55 48.165,81.515 U2.7@49.55,81.515
  Top Layer w0.4: R95.2@-3.8,88.2 -3.447,87.847 -3,87.4 v1@-3,86.45 ; X10.1@-2.503,11.8 X12.1@-0.003,11.8 v1@14.251,11.8 ; U1.1@11.828,7.097 13.158,7.097 15.698,4.557 16.999,4.557 U1.14@17.004,4.551 ; v1(14.354,17.955) 37.009,17.955 37.953,18.898 U6.16@43.13,18.898 ; U11.3@22.38,36.425 24.465,36.425 26.981,33.91 v1(40.484,33.91) ; R98.2@32.908,32.008 32.908,33.909 ; 40.484,49.467 40.484,49.564 ; C54.2@40.519,50.58 40.519,49.176 v1@41.182,48.513 ; v1@41.384,48.513 U10.16@43.159,48.518 ; K1.4@67.356,89.84 K2.4@67.356,80.54 67.356,80.494 K2.4@67.4,80.45
  Top Layer w0.5: v1@-4.327,98.026 -4.277,97.976 -3.505,97.204 U23.8@-3.505,96.2 ; v1(40.51,18.955) C19.2@40.51,20.654 ; U5.1@44.575,102.45 44.75,102.45 44.779,102.421 45.15,102.05 47.25,102.05 ; U5.3@44.575,104.35 U5.3@44.8,104.35 ; U5.3@44.804,104.354 45.15,104.7 47.45,104.7 ; 47.45,97.318 U9.7@49.561,97.318
  Top Layer w0.6: v1(41,43.5) 46.762,43.5 47.462,44.2 53.831,44.2 54.531,43.5 64.3,43.5 65.701,42.099 65.9,41.9 65.95,41.9 v1(67.45,41.9) 68.15,41.9 68.85,41.2 71.9,41.2 72.6,41.9 75.45,41.9 JP4.15@75.5,41.9 ; R53.2@65.938,31.943 v1(67.543,31.943) ; R67.2@65.938,38.543 v1(67.543,38.543) ; R56.2@65.95,35.2 67.5,35.2 v1(67.55,35.25) ; R46.2@66,28.6 v1@67,28.6
  Top Layer w0.8: v1(46.25,74) 46.75,74.5 46.75,80.571 46.75,85.15 47.45,85.85 v1@47.45,86.573 ; v1(46.586,92.624) 46.486,92.724 46.486,95.675 47.45,96.64 47.45,101.991 47.935,102.476 47.935,104.476 47.45,104.961 ; 47.45,104.7 v1(47.45,105.9)
  Bottom Layer w0.3: v1@-4.327,98.026 -4.65,97.703 -4.65,89.05 -3.434,87.835 -3.05,87.45 -3.05,86.45 v1@-3,86.45 ; R97.2@35.946,93.418 35.946,91.961 v1(36.433,91.474) ; v1(67.45,41.9) v1@67.55,41.8 ; v1(67.543,31.943) v1@67.55,31.95
  Bottom Layer w0.4: v1@-4.377,98.026 -4.327,98.026 -4.327,97.676 -3.351,96.7 1.45,96.7 2.75,98 10.6,98 11.35,98.75 13.65,98.75 16.5,101.6 JP6.3@16.89,101.6 ; v1(14.254,11.803) v1@14.354,11.903 ; v1(14.404,5.751) 14.354,5.801 14.354,22.056 16.054,23.756 v1(16.054,25.206) ; v1@40.5,43.5 v1(41,43.5) ; 40.534,48.513 v1(41.434,48.513) ; v1(46.9,96.15) 47.411,96.15 C57.2@49.536,98.276
  Bottom Layer w0.5: v1(35.8,97.176) 36,97.376 37.683,97.376 38.909,96.15 v1(46.9,96.15) ; v1@47.2,80.54 48.953,80.54 62.049,80.54 62.448,80.14 63.679,80.14 64.078,80.54 K2.4@67.356,80.54 ; v1@67,28.6 67.15,28.75 67.55,29.15 67.55,31.943 67.55,31.95 v1(67.55,35.25) 67.55,38.543 v1@67.55,41.8
  Bottom Layer w0.6: C17.2@64.89,35.21 v1(67.55,35.25) ; K1.4@67.356,89.84 67.766,90.25 D5.2@70.85,90.25 D5.2@70.9,90.25
  Bottom Layer w0.8: JP6.4@16.89,104.14 18.8,106.05 47.3,106.05 v1(47.45,105.9) ; 40.45,14.35 40.45,11.338 43.457,8.331 44.656,7.132 JP1.5@44.656,1.8 ; 40.5,14.35 40.5,22.791 39.984,23.307 39.984,24.641 41.084,25.742 41.084,28.774 40.5,29.358 40.5,37.8 40.5,52.027 40.764,52.291 40.764,53.938 40.25,54.452 40.25,55.9 40.5,56.15 40.5,62.65 40.5,68.2 v1@46.25,73.95 ; v1(46.586,92.624) 46.586,87.423 v1(47.436,86.573)
  Bottom Layer w1: JP6.3@16.89,101.6 JP6.4@16.89,104.14
  other v1: 67.291,28.608 46.886,80.571 -2.977,86.173 -4.177,98.076
+5V_IZ: 
+IAKB1: JP4.32 R123.1 R124.2 | length 16.5
  Top Layer w0.5: R124.2@76.743,75.362 76.7,75.4 76.7,75.362 76.7,74.45 78.55,72.6 78.55,71.857 R123.1@78.562,71.857
  Bottom Layer w0.4: v1(77.75,73.4) 76.693,72.343 76.693,63.547 JP4.32@77.99,62.25
+IAKB2: JP4.34 R63.1 R64.2 | length 13
  Top Layer w0.5: JP4.34@77.99,64.79 77.99,68.915 R63.1@77.993,68.918 78.794,68.918 79.544,69.669 79.544,75.02 R64.2@79.194,75.37 ; R63.1@77.99,68.39 78.55,68.95 78.85,68.95 ; R64.2@79.55,75.35 79.55,75.4 R64.2@79.575,75.375
+UOUT: JP1.2 JP4.2 R16.2 | length 42.4
  Top Layer w1: JP1.2@49.736,-0.74 50.946,-0.74 56.836,5.15 60.338,5.15 61.339,6.152 66.39,6.152 67.141,6.903 77.99,17.752 JP4.2@77.99,24.15
  Bottom Layer w1: JP4.2@77.94,24.14 77.95,24.15 JP4.2@77.99,24.15
-5V: C18.2 C56.2 JP1.8 JP6.6 U2.4 U9.4 | length 183
  Top Layer w0.4: JP6.6@19.43,104.14 20.94,105.65 38.75,105.65 39.55,104.85 39.55,100.55 37.35,98.35 32.9,98.35 32.6,98.05 32.6,89.2 33.25,88.55 33.25,76.5 v1(33.9,75.85) ; v1(55.188,85.323) 55.188,84.493 U2.4@54.75,84.055 U2.4@55.255,84.055 ; 55.6,100.35 55.65,100.35
  Top Layer w0.5: U9.4@54.761,99.858 55.069,99.858 v1(56.238,101.027)
  Bottom Layer w0.4: v1(33.25,85.5) 44.45,85.5 ; v1(33.9,75.85) 36.05,73.7 36.05,65.818 36.183,65.685 36.183,64.567 36.05,64.434 36.05,58.65 36.55,58.15 36.55,49.13 36.483,49.063 36.483,46.28 36.55,46.213 36.55,40.15 37,39.7 37,15.2 36.9,15.1 36.9,9.152 40.834,5.218 40.834,0.542 JP1.8@42.116,-0.74 ; v1(39.85,100.9) 48.05,100.9 48.6,100.35 55.588,100.35 ; 44.45,85.45 44.5,85.45 45.35,84.6 55.188,84.6 57.2,84.6 C18.2@57.25,84.55 ; 55.65,100.35 55.6,100.35 ; C56.2@55.7,99.05 55.6,99.15 55.6,100.35 ; v1(56.238,101.027) 55.588,100.376 55.588,100.35 ; 55.588,100.35 55.6,100.35
-5V_IZ: 
-IAKB1: JP4.31 R13.2 R123.2 | length 15.9
  Top Layer w0.5: R13.2@73.943,75.362 73.943,73.676 R123.2@75.762,71.857
  Bottom Layer w0.4: v1(74.2,73.419) 74.2,63.5 JP4.31@75.45,62.25
-IAKB2: JP4.33 R60.2 R63.2 | length 13.2
  Top Layer w0.5: R60.2@71.385,75.383 71.385,71.926 74.393,68.918 R63.2@75.193,68.918 75.193,65.047 JP4.33@75.45,64.79 JP4.33@75.7,65.04 ; R63.2@75.6,68.8 R63.2@75.7,68.7
-UOUT: JP1.1 JP4.1 R18.1 | length 46.2
  Top Layer w1: JP1.1@49.736,1.8 55.086,7.15 59.837,7.15 60.489,7.802 65.589,7.802 75.45,17.663 JP4.1@75.45,24.1 ; R18.1@59.015,1.75 60.565,1.75 v1(60.615,1.8) ; v1@60.065,7.452 60.065,7.402 v1(60.115,7.352)
  Bottom Layer w0.5: v1(60.115,7.352) 60.115,2.301 v1(60.615,1.8)
CANH: JP4.17 R17.2 U11.7 | length 58.2
  Top Layer w0.4: U11.7@28.08,37.695 29.516,37.695 30.332,38.511 R17.2@31.632,38.511 ; v1(29.882,45.663) 29.882,45.613 29.932,45.563 46.513,45.563 47.212,46.262 47.662,46.262 ; 47.662,46.263 54.738,46.263 55.838,45.162 74.758,45.162 JP4.17@75.45,44.47 ; JP4.17@75.435,44.47 JP4.17@75.443,44.462
  Bottom Layer w0.4: v1(29.882,38.061) v1(29.882,45.663)
CANL: JP4.18 R17.1 U11.6 | length 61.6
  Top Layer w0.4: U11.6@28.08,36.425 29.466,36.425 30.228,35.663 R17.1@31.629,35.663 ; v1(30.982,44.362) 31.282,44.662 46.613,44.662 47.113,45.162 54.438,45.162 55.238,44.362 72.392,44.362 73.554,43.2 76.72,43.2 JP4.18@77.99,44.47 JP4.18@77.97,44.47
  Bottom Layer w0.4: v1(29.831,36.06) 30.982,37.21 30.982,39.261 30.682,39.561 30.682,44.062 v1(30.982,44.362)
DB1: 
DB2: 
DB3: 
DB4: 
DB5: 
DB6: 
DB7: 
DT1: JP4.9 R46.1 R47.1 | length 20.9
  Top Layer w0.5: 60.362,28.657 60.378,28.672 60.407,28.643 61.362,28.643 63.138,28.643 63.372,28.409 64.731,27.05 67.483,27.05 68.541,28.108 68.541,29.809 69.692,30.959 69.692,32.809 71.192,34.31 JP4.9@75.45,34.31
DT2: JP4.10 R53.1 R54.1 | length 22.1
  Top Layer w0.5: 60.362,31.957 R54.1@61.362,31.957 63.124,31.957 63.138,31.943 63.372,31.709 64.781,30.3 67.682,30.3 68.791,31.409 68.791,33.259 71.132,35.6 76.7,35.6 JP4.10@77.99,34.31
DT3: JP4.11 R56.1 R58.1 | length 17.2
  Top Layer w0.5: 60.362,35.257 60.362,35.243 61.362,35.243 63.138,35.243 63.372,35.009 64.781,33.6 67.782,33.6 71.082,36.9 75.45,36.9 JP4.11@75.45,36.85
DT4: JP4.12 R67.1 R68.1 | length 19.3
  Top Layer w0.5: 60.362,38.557 60.376,38.543 61.362,38.543 63.138,38.543 63.392,38.289 64.781,36.9 69.681,36.9 70.881,38.1 76.74,38.1 JP4.12@77.99,36.85
DT5: JP4.13 R73.1 R75.1 | length 16.1
  Top Layer w0.5: 60.362,41.857 60.369,41.85 61.362,41.85 63.15,41.85 63.351,41.649 63.521,41.479 64.8,40.2 70.85,40.2 71.66,39.39 JP4.13@75.45,39.39
GND: C1.2 C2.1 C3.2 C4.2 C5.2 C6.2 C7.2 C8.2 C9.2 C10.2 C12.1 C13.2 C14.1 C15.1 C16.1 C17.1 C18.1 C19.1 C20.1 C21.2 C22.1 C23.2 C24.2 C25.1 C26.2 C28.2 C30.2 C31.2 C32.2 C33.2 C34.2 C35.1 C36.1 C37.2 C38.2 C39.2 C40.2 C50.1 C51.1 C52.1 C53.1 C54.1 C55.1 C56.1 C57.1 C58.1 C60.1 C62.1 C63.1 C64.1 C65.1 C66.2 C200.1 C201.1 D3.1 D4.1 D6.1 D7.1 D8.1 D9.1 D10.1 D11.1 D12.1 D13.1 JP1.7 JP4.14 JP6.1 JP6.2 Q1.2 Q4.2 Q6.2 Q7.1 Q7.3 Q8.1 Q8.3 Q9.1 Q9.3 R1.1 R18.2 R19.1 R23.1 R24.2 R26.2 R28.2 R32.2 R34.1 R35.2 R39.1 R40.2 R48.1 R55.1 R59.1 R69.1 R70.1 R74.1 R76.1 R77.1 R78.1 R81.1 R82.1 R117.1 R127.1 U1.6 U1.8 U1.9 U3.15 U3.19 U3.35 U3.36 U3.47 U4.10 U5.2 U6.6 U6.7 U6.8 U10.6 U10.7 U10.8 U11.2 U11.8 U12.2 U13.11 U13.15 U13.31 U13.41 U13.55 U13.72 U13.83 U13.97 U23.4 U24.8 U24.10 U24.11 U24.16 X5.1 X9.1 X11.1 | length 62.9
  Top Layer w0.25: 3.9,83.936 U13.72@5.088,82.748 5.824,82.012 5.824,80.55 6.024,80.35 ; U13.83@6.502,76.738 7.275,77.51 7.275,78.55 ; U13.55@11.098,88.758 11.726,88.131 11.726,86.672 ; U13.97@11.452,71.788 12.182,72.518 13.426,72.518 13.8,72.892 13.8,72.918 ; C30.2@13.421,47.448 13.454,47.415 v1@13.454,45.748 ; 16.8,75.219 17.567,75.219 U13.11@18.523,74.263 ; 17.377,84.921 17.377,86.198 U13.41@18.169,86.991 ; 19,77.269 19,76.615 19.792,75.822 U13.15@19.937,75.677 22.028,73.586 22.028,72.818 ; 20.2,82.872 20.5,82.572 20.822,82.572 U13.31@21.705,83.455
  Top Layer w0.3: 9.147,33.959 9.147,33.408 9.847,32.709 U4.10@10.552,32.709
  Top Layer w0.4: C30.2@13.403,46.847 13.421,46.865 C30.2@13.421,47.448 ; 43.484,87.822 43.534,87.822 43.595,87.761 U24.8@43.595,84.725 U24.8@43.595,84.671
  Top Layer w0.5: U24.10@42.325,93.975 U24.10@42.35,94 ; U5.2@44.575,103.4 U5.2@44.809,103.4 v1@46,103.4
  Bottom Layer w0.25: 6.804,52.515 9.368,52.515 ; U3.19@10.26,49.747 U3.19@10.318,49.805 ; U3.15@11.674,48.333 12.853,49.511 12.853,49.848 ; U3.35@12.028,57.066 13.277,55.816 13.277,55.749 ; U3.47@17.932,53.884 18.948,54.899 19.055,54.899
  Bottom Layer w0.3: 6.751,52.585 6.788,52.549 ; 9.352,52.549 10.389,53.585 11.291,53.585 12.203,52.673 12.203,51.69 U3.19@10.318,49.805 ; v1@13.733,68.874 C32.2@13.733,70.631
  Bottom Layer w0.4: C35.1@26.293,64.688 27.876,64.688 28.147,64.416 28.147,62.726 30.058,60.815 30.058,58.715 29.858,58.515 v1(29.858,54.764)
  other v1: 48.447,-2.701 4.647,-2.501 9.202,-2.501 19.705,-2.501 63.466,-2.501 72.547,-2.501 77.52,-2.501 14.304,-1.75 55.614,-0.05 6.747,0 61.147,0 75.019,0 80.02,0 72.518,2.501 63.447,2.551 14.304,3.301 37.509,3.901 42.611,4.101 -3.701,4.201 3.951,4.201 24.247,4.701 29.707,4.701 70.018,5.001 75.019,5.001 80.047,5.001 49.547,5.101 -0.05,6.95 37.047,7.402 40.947,7.802 52.513,9.002 71.868,9.05 -3.651,9.15 80.02,10.003 38.61,11.05 32.447,11.503 42.647,11.703 75.019,12.103 53.113,12.803 11.647,13.103 20.947,14.104 32.047,14.404 53.213,15.804 41.911,15.85 -3.451,16.65 11.447,17.054 49.763,17.45 53.063,19.15 22.506,20.005 27.507,20.005 11.803,21.35 52.763,22.25 80.647,24.256 20.005,25.006 52.513,25.406 5.001,26.55 49.112,31.95 21.856,33.508 5.347,33.658 80.62,34.35 17.504,35.009 10.003,37.65 69.568,38.81 17.504,40.01 49.147,41.41 5.347,42.311 70.018,42.961 80.77,45.011 13.427,45.763 2.501,46.75 18.905,46.85 23.606,47.612 68.217,48.45 70.918,48.45 68.567,53.163 25.706,54.614 80.77,55.014 22.156,57.35 49.062,58.615 64.447,60.615 72.868,64.916 80.77,64.95 64.447,66.117 13.677,68.818 18.747,69.067 24.147,69.768 70.947,69.818 64.447,71.518 22.006,72.15 50.013,75.619 65.016,77.52 69.317,77.52 62.666,78.82 0,79.95 -2.301,83.221 78.22,83.35 65.016,84.521 69.347,84.521 0,85.75 48.912,86.05 80.67,86.45 56.214,87.672 4.501,87.75 36.409,87.75 43.761,88.35 75.469,88.822 63.016,88.972 34.709,91.05 76.119,91.75 7.147,91.923 68.547,91.923 62.947,93.374 71.018,94.024 73.819,94.424 5.347,96.674 71.468,97.55 76.019,98.475 40.21,98.975 63.247,99.025 45.611,99.125 80.67,99.275 5.051,100.025 9.947,100.025 7.502,102.526 46.512,103.35 10.003,104.976 50.013,104.976 55.014,104.976 5.001,105.026 60.015,105.026 80.947,105.126 63.847,105.527 72.868,105.55
GND_P: 
NetA1_1: A1.1 Q4.3 | length 5.6
  Top Layer w0.5: Q4.3@-0.803,19.503 0.198,19.503 2.201,21.505 A1.1@3.951,21.505
NetA1_2: A1.2 C3.1 R16.1 R19.2 | length 93.1
  Top Layer w0.5: v1@18.955,9.052 21.455,9.052 21.856,9.452 48.512,9.452 v1(49.713,8.252) ; v1(53.814,-0.75) 53.814,0 54.414,0.6 ; 54.425,0.589 57.686,3.85 61.489,3.85 62.59,4.951 66.89,4.951 69.388,7.45 77.061,7.45 C3.1@77.15,7.45 ; R19.2@76.85,2.7 77.15,3 77.15,7.442 C3.1@77.15,7.45 ; R16.1@78.157,13.438 77.15,12.431 C3.1@77.15,7.45
  Bottom Layer w0.5: v1@18.955,9.052 18.973,9.071 A1.2@18.973,21.544 ; v1(49.713,8.252) 53.814,4.151 v1(53.814,-0.75)
  other v1: 18.955,8.952
NetBT2_1: 
NetBT2_2: 
NetBT700_1: 
NetC2_1: 
NetC2_2: C2.2 U4.8 Y5.2 | length 10.2
  Top Layer w0.25: Y5.2@10.226,40.268 11.852,38.642 U4.8@11.852,32.709
  Bottom Layer w0.25: Y5.2@10.226,40.268 12.134,40.268 C2.2@12.177,40.311
NetC11_1: C11.1 C15.2 R57.2 R62.1 U9.6 | length 16.8
  Top Layer w0.4: R62.1@53.162,91.207 53.193,91.207 53.207,91.207 54.52,91.207 C15.2@55.538,92.224
  Top Layer w0.5: 49.05,93.95 49.05,93.925 49.05,93.9 50.106,93.9 R57.2@50.238,94.032 ; U9.6@49.55,98.6 49.561,98.6 50.95,98.6 51.95,97.6 51.95,95.744 R57.2@50.312,94.107 R57.2@50.238,94.032 ; R62.1@53.3,91.3 53.207,91.207 53.2,91.2 53.193,91.207 53.178,91.222 50.368,94.032 50.312,94.032 R57.2@50.238,94.032 ; R62.1@53.643,91.207 R62.1@53.662,91.207
  Bottom Layer w0.5: 49.05,93.9 50.25,93.9 C11.1@50.35,94
  other v1: 48.436,93.925
NetC11_2: C11.2 R57.1 R61.2 U9.2 | length 11
  Top Layer w0.5: R57.1@53.645,93.94 53.956,94.25 v1(55.45,94.25) 56.55,94.25 ; U9.2@54.761,97.318 55.982,97.318 56.55,96.75 56.55,94.25 ; R61.2@58.057,94.238 58.05,94.25 56.55,94.25
  Bottom Layer w0.6: C11.2@53.653,93.947 53.956,94.25 v1(55.45,94.25) v1@55.5,94.25
NetC12_2: C12.2 K1.3 R60.1 R61.1 | length 32
  Top Layer w0.5: R61.1@58.057,91.438 58.057,92.307 58.65,92.9 59.55,92.9 60.875,94.225 60.95,94.3 61.816,94.3 K1.3@64.856,97.34 65.66,97.34 71.143,91.857 R60.1@71.143,78.162
NetC14_2: C14.2 K1.1 R64.1 R65.1 | length 44.4
  Top Layer w0.5: R65.1@58.05,99.65 58.05,99.6 60.75,96.9 60.853,96.9 62.6,96.9 v1(62.65,96.85) ; R64.1@79.55,78.15 79.55,85.55 78.25,86.85 78.25,88.65 79.856,90.256 K1.1@79.856,97.34
  Bottom Layer w0.5: v1(62.65,96.85) 63.65,95.85 78.366,95.85 K1.1@79.856,97.34
NetC21_1: C21.1 C34.1 U3.18 U3.23 U3.37 | length 48.4
  Top Layer w0.3: C21.1@1.551,57.651 C21.1@1.551,57.701 1.551,58.101 v1(2.852,59.401) ; v1@2.878,58.985 3.073,59.18 3.228,59.335 4.662,59.335 5.067,58.931 6.482,58.931 8.028,57.385 10.178,57.385 10.928,58.135 13.628,58.135 14.578,59.085 v1(15.128,59.085)
  Bottom Layer w0.3: v1@2.878,58.985 2.878,51.535 4.078,50.335 4.078,49.535 ; U3.23@8.846,51.161 7.22,49.535 4.078,49.535 ; U3.18@10.614,49.394 7.256,46.035 5.578,46.035 4.078,47.535 4.078,49.535 ; U3.37@14.397,57.419 15.128,58.15 v1(15.128,59.085) 15.128,63.285 C34.1@15.078,63.335
NetC22_1: 
NetC22_2: C22.2 U4.9 Y5.1 | length 5.1
  Top Layer w0.25: Y5.1@10.226,35.268 11.202,34.292 U4.9@11.202,32.709
  Bottom Layer w0.25: Y5.1@10.226,35.268 12.154,35.268 C22.2@12.29,35.403
NetC23_1: C23.1 R65.2 R69.2 U9.3 | length 14.7
  Top Layer w0.5: R65.2@58.05,96.85 58.05,96.9 56.362,98.588 U9.3@54.761,98.588 52.762,98.588 52.55,98.8 52.55,100.25 54.234,101.934 C23.1@54.234,102.624 54.258,102.6 58.05,102.6 R69.2@58.112,102.607
NetC33_1: C33.1 R98.1 R99.1 U12.4 | length 78.8
  Top Layer w0.4: v1(2.451,19.305) 2.794,19.648 14.61,19.648 15.454,18.805 28.414,18.805 29.257,19.648 R99.1@31.096,19.648 ; v1(2.801,28.207) 7.302,28.207 9.502,30.408 19.705,30.408 21.299,32.001 R98.1@30.046,32.001 ; v1(2.801,33.408) 2.801,35.559 5.251,35.559 C33.1@6.152,36.459
  Bottom Layer w0.4: v1(2.451,19.305) 2.001,19.755 2.001,24.156 2.851,25.006 2.851,33.358 v1(2.801,33.408)
NetC35_2: C35.2 U13.16 Y1.2 | length 11.1
  Top Layer w0.25: U13.16@20.291,76.031 24.7,71.621 24.7,71 26.151,69.549 26.25,69.549 Y1.2@26.255,69.549
  Bottom Layer w0.3: Y1.2@26.255,69.549 26.255,69.547 26.255,67.526 C35.2@26.293,67.488 C35.2@26.3,67.494
NetC36_2: C36.2 U13.18 Y1.1 | length 9.3
  Top Layer w0.25: U13.18@20.998,76.738 25.687,72.049 26.25,72.049 Y1.1@26.255,72.049
  Bottom Layer w0.3: Y1.1@26.255,72.049 26.255,74.16 C36.2@26.257,74.162
NetC45_1: 
NetC45_2: 
NetC46_1: 
NetC46_2: 
NetC47_2: 
NetC48_1: 
NetC48_2: 
NetC49_1: 
NetC50_2: C50.2 U24.2 Y4.1 | length 11.3
  Top Layer w0.5: U24.2@35.975,84.725 35.975,77.633 Y4.1@37.45,76.158
  Bottom Layer w0.5: Y4.1@37.45,76.158 39.542,76.158 C50.2@39.562,76.143
NetC51_2: C51.2 U13.23 Y3.1 | length 8.9
  Top Layer w0.25: U13.23@22.766,78.505 24.029,77.242 Y3.1@29.25,77.242
  Bottom Layer w0.3: C51.2@29.197,79.147 29.25,79.094 Y3.1@29.25,77.242
NetC52_2: C52.2 U13.22 Y3.2 | length 11.6
  Top Layer w0.25: U13.22@22.412,78.152 26.014,74.55 27.45,74.55 29.25,72.75 Y3.2@29.25,72.242
  Bottom Layer w0.3: C52.2@29.25,70.2 Y3.2@29.25,72.242
NetC53_2: C53.2 U24.3 Y4.2 | length 5.8
  Top Layer w0.5: U24.3@37.245,84.725 37.245,81.363 Y4.2@37.45,81.158
  Bottom Layer w0.5: Y4.2@37.45,81.158 39.548,81.158 C53.2@39.562,81.143
NetC61_1: C61.1 C64.2 R12.2 R122.1 U2.6 | length 22.8
  Top Layer w0.5: U2.6@49.55,82.75 51.65,82.75 ; C61.1@52.4,77.75 51.65,78.5 v1(51.65,79.35) 51.65,82.75 ; C61.1@52.5,77.7 54,76.2 56.606,76.2 R12.2@58.112,77.707 ; R122.1@53.05,88.65 51.7,87.3 51.7,84.95 51.65,84.9 51.65,82.75
  Bottom Layer w0.5: v1(51.65,79.35) 51.65,78.5 52.4,77.75 52.547,77.75 C64.2@52.55,77.75
NetC61_2: C61.2 R12.1 R121.2 U2.2 | length 18.3
  Top Layer w0.5: R121.2@58.057,83.438 57.938,83.438 56.015,81.515 U2.2@54.75,81.515 52.915,81.515 52.65,81.25 52.65,80.05 54.95,77.75 55.2,77.75 55.25,77.7 55.25,77.703 55.25,77.75 55.253,77.753 56.7,79.2 59.85,79.2 60.85,78.2 60.85,77.707 R12.1@60.85,77.7
NetC62_2: C62.2 K2.3 R13.1 R121.1 | length 30
  Top Layer w0.5: R121.1@58.057,80.638 58.05,80.7 58.057,80.7 58.1,80.7 60.85,83.45 62.05,83.45 64.856,86.256 K2.3@64.856,88.04 ; R13.1@73.943,78.162 73.943,87.993 v1(74,88.05)
  Bottom Layer w0.5: K2.3@64.856,88.04 73.99,88.04 v1(74,88.05)
NetC63_2: C63.2 K2.1 R124.1 R125.1 | length 33
  Top Layer w0.5: R125.1@58.043,88.862 58.05,88.85 58.05,88.75 60.75,86.05 60.853,86.05 62.65,86.05 v1(62.85,86.25) ; v1(75.55,86.85) 75.55,79.356 R124.1@76.743,78.162
  Bottom Layer w0.5: v1(62.85,86.25) 65.35,86.25 65.95,86.85 v1(75.55,86.85) 78.666,86.85 K2.1@79.856,88.04
NetC66_1: C66.1 R125.2 R127.2 U2.3 | length 12.8
  Top Layer w0.4: R127.2@53.088,86.093 53.817,86.823 54.838,86.823 55.388,86.823 56.148,86.062 R125.2@58.043,86.062
  Top Layer w0.5: R127.2@53.65,86.15 53.65,86.1 53.365,85.816 52.75,85.2 52.75,83.5 53.465,82.785 U2.3@54.75,82.785
  Bottom Layer w0.5: C66.1@53.147,86.153 53.817,86.823 v1@54.788,86.823
  other v1: 54.838,86.923
NetC200_2: C200.2 U1.16 Y2.2 | length 9.7
  Top Layer w0.5: U1.16@16.978,7.103 21.329,7.103 21.436,7.209 Y2.2@23.23,7.209 26.543,7.209 C200.2@26.593,7.259
NetC201_2: C201.2 U1.15 Y2.1 | length 11.8
  Top Layer w0.5: U1.15@17.028,5.827 20.805,5.827 22.03,4.602 22.03,3.41 23.337,2.102 C201.2@26.581,2.102
NetC302_1: 
NetC302_2: 
NetC500_2: 
NetC502_1: 
NetC502_2: 
NetC505_1: 
NetC505_2: 
NetC508_1: 
NetC510_1: 
NetC511_1: 
NetC511_2: 
NetC512_2: 
NetC513_2: 
NetC514_1: 
NetC516_1: 
NetC516_2: 
NetC517_1: 
NetC600_1: 
NetC600_2: 
NetC700_1: 
NetC700_2: 
NetC701_1: 
NetC702_1: 
NetC704_2: 
NetC705_2: 
NetC706_1: 
NetC707_1: 
NetC707_2: 
NetC709_1: 
NetC709_2: 
NetC710_1: 
NetC713_1: 
NetC714_1: 
NetC715_1: 
NetD1_2: D1.2 X18.1 | length 4.3
  Top Layer w0.5: D1.2@19.255,11.853 19.268,11.853 19.321,11.8 X18.1@23.497,11.8
NetD3_1: 
NetD3_2: 
NetD5_1: D5.1 K1.5 K2.5 Q6.3 | length 26.3
  Top Layer w0.5: K2.5@77.356,80.54 76.85,81.045 76.85,89.334 K1.5@77.356,89.84 77.55,90.034 77.55,98.55 79.2,100.2 79.2,101.42 Q6.3@78.944,101.677
  Bottom Layer w0.4: D5.1@73.65,90.25 76.945,90.25 K1.5@77.356,89.84
NetD20_2: 
NetD500_1: 
NetD500_2: 
NetD501_1: 
NetD503_1: 
NetD505_1: 
NetD505_2: 
NetD506_1: 
NetD700_1: 
NetD701_1: 
NetD702_1: 
NetD703_2: 
NetD704_1: 
NetD705_1: 
NetD706_1: 
NetDS1_1: 
NetDS1_2: 
NetFU500_1: 
NetFU700_1: 
NetFU700_2: 
NetJ1_2: 
NetJ1_3: 
NetJ1_4: 
NetJ1_7: 
NetJ301_1: 
NetJ301_2: 
NetJ301_3: 
NetJ301_6: 
NetJ301_10: 
NetJ301_11: 
NetJ600_1: 
NetJP1_9: 
NetJP1_10: 
NetJP2_1: 
NetJP2_2: 
NetJP3_3: 
NetJP3_3: 
NetJP5_5: 
NetJP5_6: 
NetJP5_7: 
NetJP5_9: 
NetJP5_10: 
NetJP5_11: 
NetJP5_12: 
NetJP9_1: 
NetJP10_1: 
NetJP10_2: 
NetJP10_3: 
NetJP10_4: 
NetJP10_5: 
NetJP10_6: 
NetQ1_1: Q1.1 R1.2 R84.2 | length 5
  Bottom Layer w0.3: R84.2@71.289,75.768 75.541,75.768 Q1.1@76.043,76.27
NetQ1_1: 
NetQ1_2: 
NetQ4_1: Q4.1 R22.2 R23.2 | length 16.4
  Top Layer w0.3: Q4.1@-3.051,20.405 -0.8,22.656 v1(0.3,22.656) ; v1(1,17.154) 1,17.104 1.038,17.142 R22.2@7.308,17.142
  Bottom Layer w0.3: v1(0.3,22.656) 1,21.956 v1(1,17.154)
NetQ5_2: 
NetQ6_1: Q6.1 R72.2 R74.2 | length 5.4
  Top Layer w0.5: R72.2@73.843,101.826 75.043,101.826 75.841,102.625 Q6.1@76.597,102.625 ; Q6.1@76.1,102.883 76.1,105.184 R74.2@76.1,105.228
NetQ7_2: Q7.2 R31.2 R34.2 | length 6.2
  Top Layer w0.5: R31.2@56.188,63.293 56.194,63.3 57.5,63.3 57.675,63.125 57.725,63.075 57.775,63.025 58.16,62.64 Q7.2@61.312,62.64
  Bottom Layer w0.5: v1@58.05,63.25 58.8,63.25 58.812,63.293
  other v1: 58.05,63.3
NetQ7_4: Q7.4 R38.2 R39.2 | length 6.1
  Top Layer w0.5: R38.2@56.2,60.6 57.5,60.6 57.689,60.411 57.739,60.361 57.789,60.311 58,60.1 58.05,60.1 Q7.4@61.312,60.1
  Bottom Layer w0.5: v1(58.05,60.572) 58.722,60.572 58.75,60.6 58.812,60.593
NetQ8_2: Q8.2 R30.2 R77.2 | length 6.2
  Top Layer w0.5: R30.2@56.188,68.893 57.493,68.893 57.5,68.9 57.678,68.722 57.778,68.622 58.265,68.135 Q8.2@61.3,68.135
  Bottom Layer w0.5: v1(58.05,68.893) 58.812,68.893
NetQ8_4: Q8.4 R37.2 R78.2 | length 6.1
  Top Layer w0.5: R37.2@56.188,66.093 57.5,66.093 57.675,65.918 57.725,65.868 57.775,65.818 57.998,65.595 58.05,65.595 Q8.4@61.3,65.595
  Bottom Layer w0.5: v1(58.05,66.093) 58.812,66.093
NetQ9_2: Q9.2 R79.2 R81.2 | length 7.2
  Top Layer w0.5: R79.2@56.138,74.143 57.45,74.143 ; 57.45,74.1 57.45,74.143 ; Q9.2@61.3,73.535 58.115,73.535 57.8,73.85 57.75,73.9 57.7,73.95 57.507,74.143 57.45,74.143
  Bottom Layer w0.5: v1@58.05,74.143 R81.2@59.762,74.143
  other v1: 58.05,74.1
NetQ9_4: Q9.4 R80.2 R82.2 | length 6.7
  Top Layer w0.5: R80.2@56.138,71.543 57.443,71.543 57.45,71.55 57.65,71.35 57.7,71.3 57.75,71.25 58.005,70.995 58.05,70.995 Q9.4@61.3,70.995
  Bottom Layer w0.5: 58.762,71.543 R82.2@59.862,71.543 R82.2@60.05,71.543
  other v1: 58.05,71.55
NetQ10_1: 
NetQ10_3: 
NetQ10_3: 
NetQ11_1: 
NetQ11_1: 
NetQ11_3: 
NetQ500_1: 
NetQ501_1: 
NetQ600_1: 
NetQ600_3: 